# Altium PCB sami_updated_v3.PcbDoc
Units mil, origin at the board's own origin, x right, y up, seen from the top; angles counter-clockwise.
Board outline 1157.48 x 610 mil, 2 copper layers (Top Layer, Bottom Layer); 22 components, 24 nets, 105 pads, 43 vias.
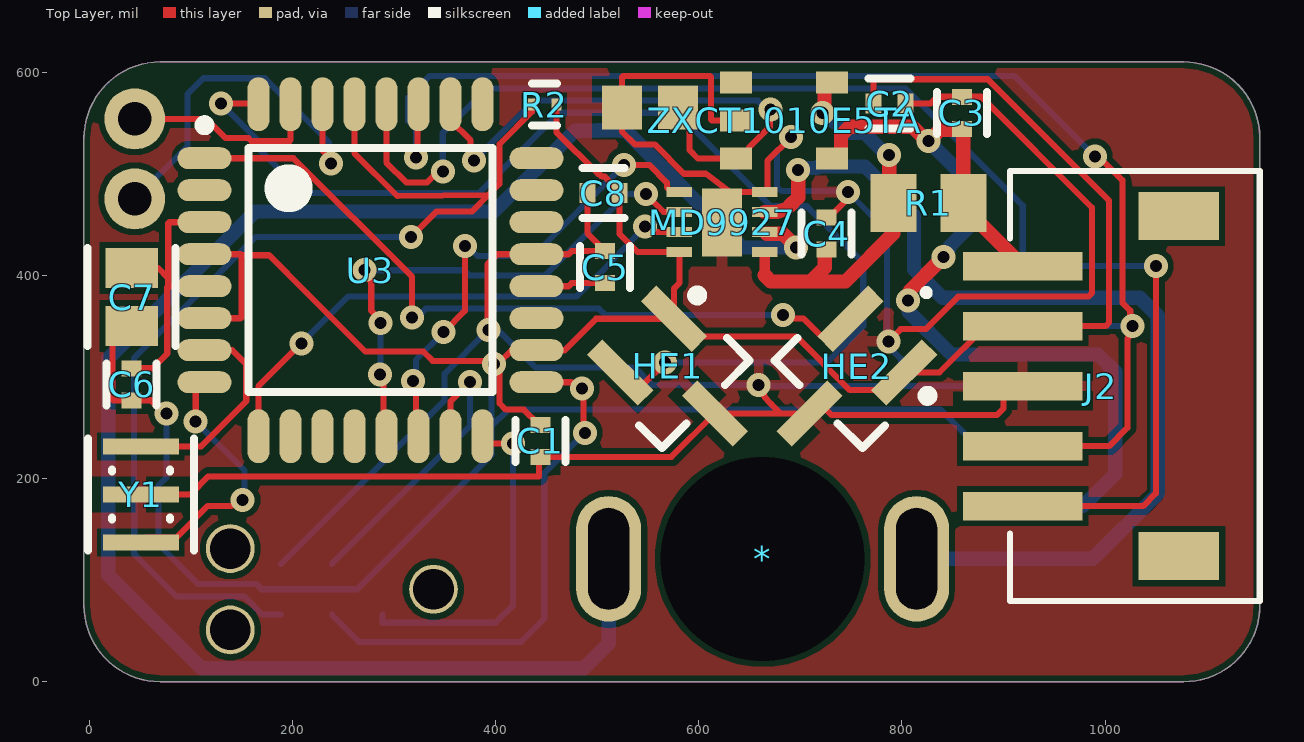
[diagram p0: Top Layer view]
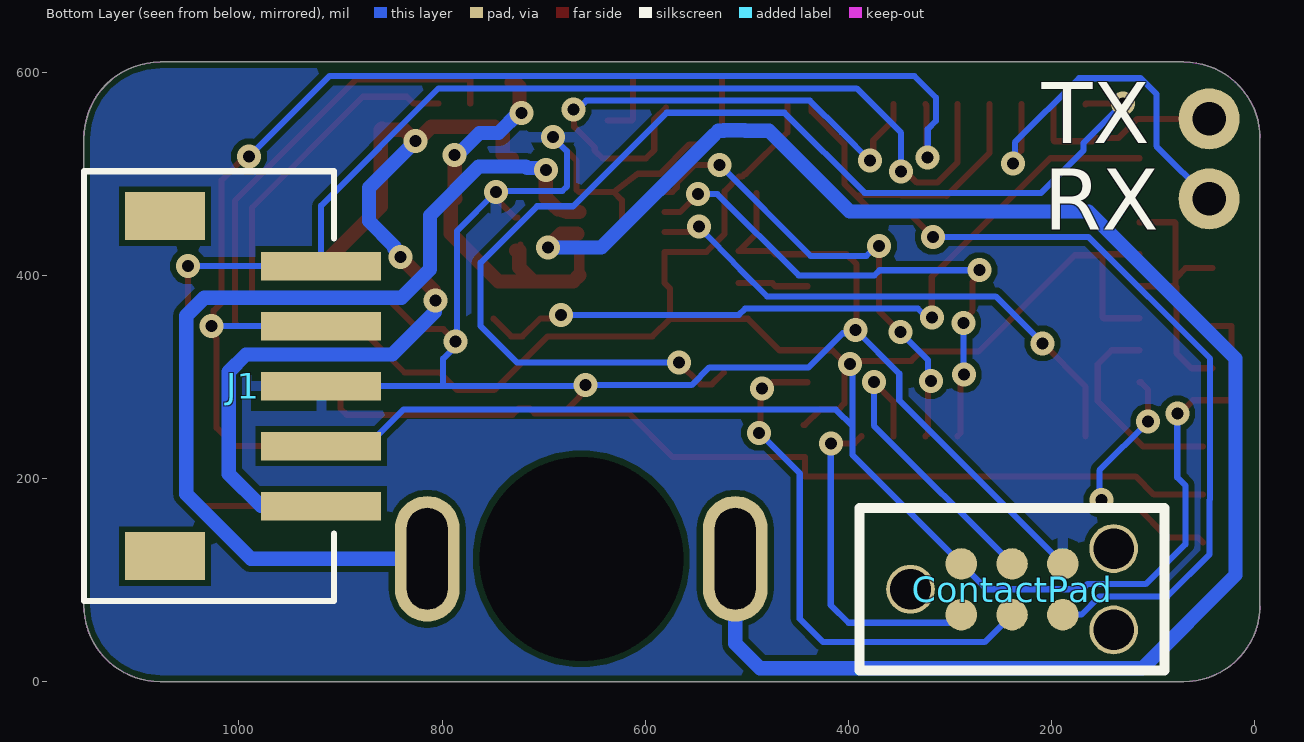
[diagram p1: Bottom Layer view, seen from below]
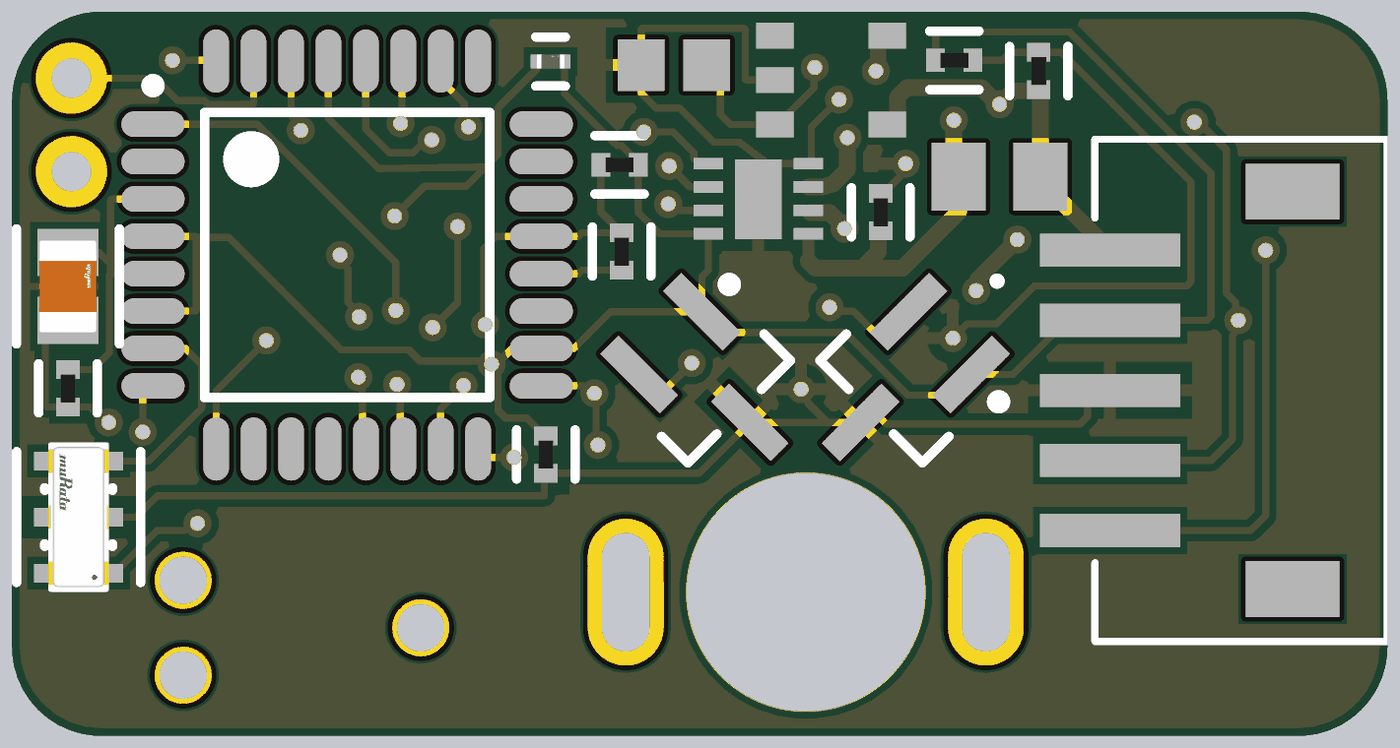
[diagram p2: 3D render of the assembled board from above, using the file's embedded part models]

## Layer stack, top to bottom
Top Solder: solder mask 0.4, Solder Resist, Dk 3.5
Top Layer: signal copper 1.4
Dielectric 1: dielectric 12.6, FR-4, Dk 4.8
Bottom Layer: signal copper 1.4
Bottom Solder: solder mask 0.4, Solder Resist, Dk 3.5

## Board outline
-5,75 ccw(c70,75) 70,0 1077.48,0 ccw(c1077.48,75) 1152.48,75 1152.48,535 ccw(c1077.48,535) 1077.48,610 70,610 ccw(c70,535) -5,535

## Design rules (kind name [scope] priority, off if disabled: settings)
Clearance Clearance_1 [All] p1: gap=6 ignorepadtopadclearanceinfootprint=FALSE except(0: Arc-Hole Track-Hole SMDPad-Hole THPad-Hole Via-Hole Fill-Hole Poly-Hole Region-Hole Text-Hole)
HoleSize [All] p1: absolutevalues=TRUE maxlimit=100 minlimit=11.81 maxpercent=80.000 minpercent=20.000
MinimumAnnularRing [All] p1: minimumring=7.87
PolygonConnect [All] p1: connectstyle=Relief reliefconductorwidth=10 reliefentries=4 polygonreliefangle="90 Angle" airgapwidth=10
RoutingVias [All] p1: holewidth=11.81 width=23.62 viastyle="Through Hole" minholewidth=11.81 minwidth=23.62 maxholewidth=11.81 maxwidth=23.62
SolderMaskExpansion [All] p1: expansion=4 istentingtop=FALSE
Width [All] p1: maxlimit=15 minlimit=6 preferedwidth=6 minimp=50.000000 maximp=50.000000 favimp=50.000000
29 further rules are at their usual default settings.

## Classes and differential pairs
component class updated_sami_board_v3: 3 C1 C2 C3 C4 C5 C6 C7 C8 HE1 HE2 J1 J2 R1 R2 U3 Y1

## Components (designator, comment, footprint, x,y, rotation, side; value= is the part's Value field where it differs from the comment)
* "Component_1" "UART Header Pins" 45,475.26 r0 top
* "Poluou motor" PCBComponent_1 814.57,121 r180 top
C1 "GRM155R71C104KA88D - 0.1 uF -16V" FP-GRM15-MFG 444.25,237 r90 top value=0.10μF
C2 "GRM155R71C104KA88D - 0.1 uF - 16V" FP-GRM15-MFG 788,569 r180 top value=0.10μF
C3 "GRM155R71C104KA88D - 0.1 uF - 16V" FP-GRM15-MFG 859,560 r270 top value=0.10μF
C4 "GRM155R71C104KA88D - 0.1 uF - 16V" FP-GRM15-MFG 726,441 r270 top value=0.10μF
C5 "GRM155R71C104KA88D - 0.1 uF - 16V" FP-GRM15-MFG 508,408 r270 top value=0.10μF
C6 "GRM155R71C104KA88D - 0.1 uF - 16V" FP-GRM15-MFG 42,292.75 r270 top value=0.10μF
C7 "GRM21BR61E106KA73L - 10 uF -25V" FP-GRM21B-0_15-IPC_C 42,378.59 r90 top
C8 "GRM155R71C104KA88D - 0.1 uF - 16V" FP-GRM15-MFG 506.25,481 r0 top value=0.10μF
ContactPad "6 Pin Contact Pad" 6PinContactPad 29,71 r90 bottom
HE1 "TLE4946-2K" INF-PG-SC59_M 582.59,297.41 r315 top
HE2 "TLE4946-2K" INF-PG-SC59_M 742.41,297.41 r225 top
J1 "S5B-ZR-SM4A-TF (LF) (SN)" CONN_S5B-ZR-SM4A-TF_JST 919,172.83 r90 bottom
J2 "S5B-ZR-SM4A-TF (LF) (SN)" CONN_S5B-ZR-SM4A-TF_JST 919,409.11 r270 top
MD9927 "MD9927" MD9927 665.03,482 r180 top
R1 "RL1220S-R50-F - 0.5 Ohm 1/3W" RESC2013X50X40NL20T20 826,471 r180 top
R2 "ERJ-1GNF1002C - 10kOhm 1/20 W" FP-ERJ1G-MFG 448.19,568 r0 top value=10kΩ
R3 "ERA3AEB122V - 1.2 kOhm, 1/10W" RESC1608X55X30ML20T20 552,565 r0 top
U3 "ATmega328-AU" 32A_L 277,405 r0 top
Y1 "CSTNE16M0V53C000R0 - 16 MHz Crystal" FP-CSTNE16M0V53C000R0-MFG 51,184.24 r270 top
ZXCT1010E5TA "ZXCT1010E5TA" ZXCT1010E5TA 731.49,515 r90 top

## Footprints (in the part's own frame and the unit in brackets; to place one, negate y for a bottom-side part, rotate by r counter-clockwise, add the part's x,y. Pads: shape width x height; smd on the part's side, far side on the other; paste and mask are expansions set on the pad)
6PinContactPad [mil]
  round 30.98 smd: 1(-5,260) 2(45,260) 3(-5,210) 4(45,210) 5(-5,160) 6(45,160)
  round 48 hole 40 unplated: 25(20,310) 26(-20,110) 27(60,110)
  silkscreen extent -60,60 100,360
32A_L [mm] "Thin QFP, 32-Leads, Body 7x7mm, Pitch 0.8mm, IPC High Density"
  oval 1.35x0.55 smd: 1(-4.15,2.8) 2(-4.15,2) 3(-4.15,1.2) 4(-4.15,0.4) 5(-4.15,-0.4) 6(-4.15,-1.2) 7(-4.15,-2) 8(-4.15,-2.8) 17(4.15,-2.8) 18(4.15,-2) 19(4.15,-1.2) 20(4.15,-0.4) 21(4.15,0.4) 22(4.15,1.2) 23(4.15,2) 24(4.15,2.8)
  oval 0.55x1.35 smd: 9(-2.8,-4.15) 10(-2,-4.15) 11(-1.2,-4.15) 12(-0.4,-4.15) 13(0.4,-4.15) 14(1.2,-4.15) 15(2,-4.15) 16(2.8,-4.15) 25(2.8,4.15) 26(2,4.15) 27(1.2,4.15) 28(0.4,4.15) 29(-0.4,4.15) 30(-1.2,4.15) 31(-2,4.15) 32(-2.8,4.15)
  silkscreen extent -4.27,-3.05 3.05,3.75, body extent -3.5,-3.5 3.5,3.5, height 1.2
CONN_S5B-ZR-SM4A-TF_JST [mil]
  rect 28x118 smd paste+0 mask+0: 1(0,0) 2(59.06,0) 3(118.11,0) 4(177.17,0) 5(236.22,0)
  rect 47x79 smd: 6(-49.21,153.62) 7(285.43,153.62)
  silkscreen extent -93,-13 330,233, body extent 0,0 10,10, height 10
FP-CSTNE16M0V53C000R0-MFG [mm]
  rect 0.4x1.9 smd paste+0 mask+0: 1(-1.2,0) 2(0,0) 3(1.2,0)
  silkscreen extent -1.4,-1.33 1.4,1.33, body extent -1.6,-0.65 1.6,0.65, height 1
FP-ERJ1G-MFG [mm]
  rect 0.25x0.3 smd paste+0 mask+0: 1(-0.3,0) 2(0.3,0)
  silkscreen extent -0.32,-0.53 0.32,0.53, body extent -0.53,-0.27 0.53,0.27, height 0.25
FP-GRM15-MFG [mm]
  rect 0.4x0.5 smd paste+0 mask+0: 1(-0.4,0) 2(0.4,0)
  silkscreen extent -0.53,-0.62 0.53,0.62, body extent -0.7,-0.38 0.7,0.38, height 0.25
FP-GRM21B-0_15-IPC_C [mil]
  rect 39.6x51.5 smd paste+0 mask+0: 1(-28.59,0) 2(28.59,0)
  silkscreen extent -48,-43 48,43, body extent -39,-25 39,25, height 55
INF-PG-SC59_M [mm] "SOT23, 3-Leads, Body 3x1.53mm, Pitch 0.95mm, IPC Low Density"
  rect 1.8x0.55 smd: 1(-1.2,0.95) 2(-1.2,-0.95) 3(1.2,0)
  silkscreen extent -1.32,-1.55 0.88,1.9, body extent -0.88,-1.55 0.88,1.55, height 1.35
MD9927 [mm]
  rect 0.635x0.25 smd mask+0: GND(0,0) IN1(2.135,0.5) IN2(2.135,0) nSLEEP(2.135,1) OUT1(0,1) OUT2(0,0.5) VCC(2.135,1.5) VM(0,1.5)
  rect 1x1.7 smd mask+0: GND(1.068,0.762)
PCBComponent_1 [mm]
  round 0 hole 5.1: 28(3.85,0)
  rrect100% 1.62x3.14 hole 1.02 slot 2.54 at 90 deg: m+(7.7,0) m-(0,0)
RESC1608X55X30ML20T20 [mm] "Chip Resistor, 2-Leads, Body 1.60x0.80mm, IPC Low Density"
  rect 1x1.1 smd: 1(-0.7,0) 2(0.7,0)
  body extent -0.9,-0.5 0.9,0.5, height 0.55
RESC2013X50X40NL20T20 [mm] "Chip Resistor, 2-Leads, Body 2.00x1.25mm, IPC Medium Density"
  rect 1.15x1.45 smd: 1(-0.875,0) 2(0.875,0)
  body extent -1.1,-0.72 1.1,0.72, height 0.5
"UART Header Pins" [mil]
  round 60 hole 33.23: RX(0,0) TX(0,78.74)
ZXCT1010E5TA [mm]
  rect 0.55x0.8 smd mask+0: GND(0.95,2.4) IOUT(0,2.4) NC(1.9,2.4) VSENSE+(0,0) VSENSE-(1.9,0)

## Part data
C1 C2 C3 C4 C5 C6 C8: library part CMP-2100-03641-2, "CAP CER 0.1UF 16V X7R 0402", Capacitance=0.10μF, Manufacturer=Murata, Manufacturer Part Number=GRM155R71C104KA88D, Package=GRM15, Temperature="-55°C to +125°C", Temperature Characteristic=X7R, Temperature Range High=+125°C, Temperature Range Low=-55°C, Tolerance=10%, Voltage Rating=16Vdc, Category=Cap, ComponentLink2Description=Datasheet, ComponentLink2URL=https://search.murata.co.jp/Ceramy/image/img/A01X/G101/ENG/GRM155R71H471KA01-01A.pdf, Device Class L1="Passive Components", Device Class L2=Capacitors, Device Class L3="Ceramic Capacitors", Digikey Description="CAP CER 0.1UF 16V X7R 0402", Height=0.55mm, Ipc Land Pattern Name=CAPC10050X219, Lead Free=yes, Material=Ceramic, Mouser Description="0402 0.1 uF 16V ±10 % Tolerance X7R SMT Multilayer Ceramic Capacitor", Octopart=https://octopart.com/grm155r71c104ka88d-murata-196880, RoHS=TRUE, Standoff Height=0mm
C7: library part CMP-2007-03541-2, "Chip Multilayer Ceramic Capacitors for General Purpose, 0805, 10uF, X5R, 15%, 10%, 25V", Capacitance=10uF, Case Code (Imperial)=0805, Case Code (Metric)=2012, Dielectric=X5R, Max Operating Temperature=85°C, Min Operating Temperature=-55°C, Package Quantity=1, Tolerance=10%, Voltage=25V, Case/Package=0805, Depth=1.25mm, Height=1.25mm, Lead Free="Lead Free", Length=2mm, Material=Ceramic, Mount="Surface Mount", Packaging="Tape and Reel", Radiation Hardening=No, Termination=SMD/SMT, Thickness=0.053inch, Voltage Rating=25V, Voltage Rating (DC)=25V, Width=0.049inch
HE1 HE2: library part CMP-1148-00006-1, "High Precision Hall Effect Latch, PG-SC59, Reel, Green", Manufacturer=Infineon, Bhyst (25degreesC) max="4Â mT", Bop (25degreesC) min="2Â mT", Brp (25degreesC) typ="-2Â mT", Chopped Hall Technology=TRUE, ComponentLink1Description="Manufacturer URL", ComponentLink1URL=http://www.infineon.com/, ComponentLink2Description=Datasheet, ComponentLink2URL=http://www.infineon.com/dgdl/TLE4946-2K_DS_Rev1.pdf?folderId=db3a30431f848401011facc1c83b4674&fileId=db3a30431f848401011fbc925c48637f, ComponentLink3Description="Package Specification", ComponentLink3URL=http://www.infineon.com/dgdl/SC59-Package_Overview.pdf?folderId=db3a30431936bc4b01194dc0d34440b0&fileId=db3a30431936bc4b01194dd1aa1d40cf, DatasheetVersion="Rev. 1.0", Direction Detection=FALSE, Green=TRUE, Interface="open collector", Mounting Technology="Surface Mount", PackageDescription="3-Pin Semiconductor Package, 3 x 1.53 mm Body, 0.95 mm Pitch", PackageReference=PG-SC59, PackageVersion=Mar-08, Packing=Reel, PartNumber=TLE4946-2K, Target Application=Automotive, Type=Latch
J1 J2: "No Description Available", Mfr_Name=JST, Copyright="Copyright (C) 2021 Ultra Librarian. All rights reserved.", Manufacturer_Part_Number="S5B-ZR-SM4A-TF (LF) (SN)", RefDes=RefDes, Type=DEV
R1: library part CMP-2001-03168-1, Manufacturer=Susumu, Part Number=RL1220S-R50-F
R2: library part CMP-2004-03445-2, "RES SMD 10K OHM 1% 1/20W 0201", Manufacturer="Panasonic Electronic Components", Manufacturer Part Number=ERJ-1GNF1002C, Package=ERJ1G, Power Rating=0.05W, Resistance=10kΩ, Temperature="-55°C to +125°C", Temperature Coefficient=200ppm/°C, Temperature Range High=+125°C, Temperature Range Low=-55°C, Tolerance=1%, Voltage Rating=25V, Automotive=Yes, Automotive Grade="Grade 1", Category=Res, ComponentLink2Description=Datasheet, ComponentLink2URL=https://industrial.panasonic.com/cdbs/www-data/pdf/RDA0000/AOA0000C304.pdf, Composition="Thick Film", Device Class L1="Passive Components", Device Class L2=Resistors, Device Class L3="Chip SMD Resistors", Digikey Description="RES SMD 10K OHM 1% 1/20W 0201", Footprint Url=https://industrial.panasonic.com/cdbs/www-data/pdf/RDA0000/DMA0000COL17.pdf, Height=0.26mm, Lead Free=Yes, Mouser Description="Thick Film Resistors - SMD 0201 10Kohm 1% HalogenFree AEC-Q200", Octopart=https://octopart.com/erj-1gnf1002c-panasonic-55419697, RoHS=TRUE, Series=ERJ
R3: library part CMP-2000-00897-1, Manufacturer=Panasonic, Part Number=ERA3AEB122V
U3: library part CMP-0095-00261-2, "8-bit AVR Microcontroller, 32KB Flash, 1KB EEPROM, 2KB SRAM, 32-pin TQFP, Industrial Grade (-40°C to 85°C)", Code_JEDEC=MS-026-ABA, ComponentLink1Description="Manufacturer URL", ComponentLink1URL=http://www.atmel.com/, ComponentLink2Description="ATmega48A/48PA/88A/88PA/168A/168PA/328/328P Datasheet", ComponentLink2URL=http://www.atmel.com/dyn/resources/prod_documents/doc8271.pdf, ComponentLink3Description="ATmega48A/48PA/88A/88PA/168A/168PA/328/328P Summary", ComponentLink3URL=http://www.atmel.com/dyn/resources/prod_documents/8271S.pdf, DatasheetVersion="revD, May-2011", PackageDescription="32-Lead, 7x7x1.0 mm Body, 0.8mm Lead Pitch, Thin Profile Plastic Quad Flat Package (TQFP)", PackageReference=32A, PackageVersion="revC, Oct-2010", RevisionNote="DatasheetVersion & PackageVersion updated. URLs added."
Y1: library part CMP-06057-000009-1, "CERAMIC RES 16.0000MHZ 15PF SMD", Capacitance=15pF, Case/Package=SMD/SMT, Frequency=16MHz, Frequency Stability=0.15%, Frequency Tolerance=0.5%, Max Operating Temperature=125°C, Min Operating Temperature=-40°C, Resistor Type=Ceramic, Impedance=40R, Mount="Surface Mount", Packaging="Tape and Reel"

## Via types
v1: diameter 23.62, hole 11.81, Top Layer to Bottom Layer, tented both sides, 43 vias

## Nets (pads, with @x,y where several pads share a name; then routed paths per layer and width w, separated by ;. In a path a pad name is that pad's centre, name@x,y a point inside that pad or via, vN(x,y) a via of type N, cw(c..) or ccw(c..) an arc to the next point about the centre after c; other vN are vias at no path point)
CUR1_TO_OPAMP_IN+: C4.2 MD9927.VM R1.2 ZXCT1010E5TA.VSENSE- | length 414.8
  Top Layer w6: C4.2@722.77,430.13 C4.2 ; R1.2@787,475.55 R1.2
  Top Layer w10: 665,400 MD9927.VM
  Top Layer w14: 665,400 671,394 710.23,394 ; v1(722,560) 723.84,561.84 723.84,585.98 727.67,589.8 ZXCT1010E5TA.VSENSE- ; C4.2@727.05,424.38 724.03,424.38 724.03,407.8 710.23,394 ; R1.2@787,475.55 787.54,476.1 v1(787.54,518.54) ; R1.2 791.55,441.05 744.5,394 710.23,394
  Bottom Layer w14: v1(722,560) 724.6,560 744.42,540.18 763.3,540.18 784.94,518.54 v1(787.54,518.54)
CURRENT_IN: R3.2 U3.26 ZXCT1010E5TA.IOUT | length 545.4
  Top Layer w6: U3.26 355.74,552.64 375.63,532.75 375.63,516.37 v1(379,513) ; R3.2 591.14,553.42 591.14,523.18 599.32,515 641.92,515 649.75,522.83 649.75,525.85 670.01,546.11 670.01,562.46 v1(670.56,563)
  Bottom Layer w6: v1(379,513) 406.69,540.69 438,572 658.23,572 667.23,563 v1(670.56,563)
GND: C1.1 C2.1 C3.1 C4.1 C5.1 C8.1 ContactPad.6 HE1.3 HE2.3 J1.3 J2.3 MD9927.GND R3.1 U3.21 Y1.2 ZXCT1010E5TA.GND | length 3467.4
  Top Layer w6: Y1.2 99.41,184.24 117.34,202.18 402.93,202.18 442.99,202.18 442.99,221.25 C1.1 573.25,221.25 HE1.3 681,264 ; v1(393.08,346.38) 392.06,347.39 392.06,410.81 402,420.75 U3.21 472,420.75 475,423.75 C5.1 490.5,441.24 C8.1 ; MD9927.GND@623,452 623,474 MD9927.GND@631,482 ; ZXCT1010E5TA.GND 613,552.4 612,553.4 612,595 611,596 525.44,596 524.44,595 R3.1 524.44,541.56 537.19,528.81 556.59,528.81 585.4,500 607,500 MD9927.GND@631,482 ; v1(659,292) 659,287.23 664.72,281.52 664.72,280.28 671.69,273.31 681,264 ; v1(691,536) 667.67,512.67 667.67,483.92 665.03,482 MD9927.GND@631,482 ; C4.1 727.97,456.75 743.63,472.41 743.63,478.63 v1(747,482) ; v1(786.77,335) 798.77,347 823.5,347 855.5,379 983.49,379 987,382.51 987,466.75 878,575.75 C3.1 834.75,575.75 828,569 C2.1 ; J2.3 911,291 900,280 900,268.86 893.8,262.66 730.72,262.66 724.72,268.66 713.66,268.66 HE2.3 681,264
  Bottom Layer w6: ContactPad.6 350,277 350,303.3 v1(393.08,346.38) ; v1@393.08,347.44 397.51,343.01 405.62,343.01 439.25,309.37 536.96,309.37 554.34,292 v1(659,292) 660.06,290.94 799,290.94 ; v1(691,536) 677.12,522.12 677.12,487.38 681.51,482.99 746.01,482.99 785.49,443.51 785.49,336.28 v1(786.77,335) 786.77,330.23 799,318 799,290.94 ; J1.3 799,290.94
INPUT1: MD9927.IN1 U3.13 | length 525.4
  Top Layer w6: v1(271,405) 271,400.23 277.77,393.46 277.77,365.33 287,356.09 v1(287,353) ; v1(286.43,302.14) 289.75,298.82 289.75,244.61 U3.13 ; v1(548,480) 565.68,462.32 MD9927.IN1
  Bottom Layer w6: v1(271,405) 369.38,405 374.38,400 449,400 529,480 v1(548,480) ; v1(286.43,302.14) 286.71,302.43 286.71,352.71 v1(287,353)
INPUT2: MD9927.IN2 U3.14 | length 476.7
  Top Layer w6: v1(319,296) 321.62,293.38 321.62,244.24 U3.14 ; v1(349,344) 370,365 v1(370,429) ; v1(526.76,508.65) 551.35,508.65 568.81,491.19 568.81,486.58 573.39,482 MD9927.IN2
  Bottom Layer w6: v1(319,296) 321.81,298.81 321.81,316.81 v1(349,344) ; v1(370,429) 372.33,429 382.33,419 437.11,419 v1(526.76,508.65)
INPUT3: MD9927.nSLEEP U3.9 | length 531.3
  Top Layer w6: U3.9 166.76,290.76 v1(209,333) ; v1(547.2,448.03) 551.97,448.03 557.37,442.63 MD9927.nSLEEP
  Bottom Layer w6: v1(209,333) 255.19,379.19 480.19,379.19 506.7,405.7 v1(547.2,448.03)
M+: *.m+ MD9927.OUT1 | length 1689.1
  Top Layer w14: MD9927.OUT1@667,440.87 682.91,440.87 691.11,432.66 v1(695.61,427.26)
  Bottom Layer w6: 528.19,542.31 532.19,538.31
  Bottom Layer w14: *.m+ 511.43,37.5 487.18,13.25 110.75,13.25 19,105 19,318 163.69,462.69 398.69,462.69 478.31,542.31 501.5,542.31 502,542.81 522.56,542.81 523.05,542.31 528.19,542.31 ; 532.19,538.31 643.24,427.26 v1(695.61,427.26)
M-: *.m- MD9927.OUT2 | length 951.5
  Top Layer w14: MD9927.OUT2 676.89,462.32 685.83,464.93 689.73,468.48 697.93,476.68 v1(697.93,503.8)
  Bottom Layer w14: v1(697.93,503.8) 699.77,505.64 716.21,505.64 717.74,507.17 763.83,507.17 812,459 812,406 840,378 1034.09,378 1051.81,360.28 1051.81,184.81 988,121 *.m-
MISO: ContactPad.1 U3.16 | length 335.9
  Top Layer w6: U3.16 394.3,234.55 v1(417.45,234.55)
  Bottom Layer w6: ContactPad.1 289,58 400,58 417.45,75.45 v1(417.45,234.55)
MOSI: ContactPad.4 U3.15 | length 296.7
  Top Layer w6: U3.15 355.74,275.74 v1(375,295)
  Bottom Layer w6: ContactPad.4 375,252 v1(375,295)
MOTOR1_IN: C3.2 J1.1 J2.1 R1.1 ZXCT1010E5TA.VSENSE+ | length 973.9
  Top Layer w6: v1@841,414.5 v1(841,418) ; 859,507.45 860.45,506 ; R1.1@860.45,467.66 R1.1
  Top Layer w14: ZXCT1010E5TA.VSENSE+ 736.41,515 740.24,518.83 740.24,537.96 748.44,546.16 810.61,546.16 824.77,532 v1(826.1,532) 837.48,543.38 858.13,543.38 C3.2 859.58,544.25 860.45,543.38 860.45,506 R1.1 ; v1(806.3,375) 808.14,376.84 808.14,385.14 837.86,414.86 840.64,414.86 v1@841,414.5 ; R1.1@860.45,467.66 J2.1
  Bottom Layer w6: J1.1 978.33,172.83
  Bottom Layer w14: v1(806.3,375) 806.84,374.46 806.84,364.16 849,322 993,322 1010,305 1010,204.5 978.33,172.83 ; v1(826.1,532) 872,486.1 872,453.44 847,428.44 847,426.6 841,420.6 v1(841,418)
NetC5_2: C5.2 U3.20 | length 68.9
  Top Layer w6: U3.20 472,389.25 475,392.25 C5.2
NetC6_1: C6.1 C7.2 U3.3 U3.5 | length 279.5
  Top Layer w6: C6.1 62.5,308.5 77,323 77,388.25 ; C7.2 68,407.18 78,397.18 ; U3.5 79,389.25 78,390.25 78,397.18 ; U3.3 79,452.24 78,451.24 78,397.18
NetU3_7: U3.7 Y1.1 | length 205.3
  Top Layer w6: Y1.1 109.92,231.49 154.69,276.26 154.69,312.5 140.93,326.26 U3.7
NetU3_8: U3.8 Y1.3 | length 258.2
  Top Layer w6: Y1.3 55.87,141.87 85.87,141.87 117,173 140.23,173 146.23,179 v1(151,179) ; v1(105,256) 105,287.53 112.23,294.76 U3.8
  Bottom Layer w6: v1(105,256) 153,208 153,181 v1(151,179)
Q1: HE1.2 U3.32 | length 1134
  Top Layer w6: v1(130,569) 166.15,569 U3.32 ; HE1.2 534.52,292.59 545.59,292.59 v1(567,314)
  Bottom Layer w6: v1(130,569) 168.84,530.16 168.84,522.66 210.35,481.15 384.15,481.15 463,560 579,560 671,468 706.5,468 762,412.5 762,350 726,314 v1(567,314)
Q2: HE2.2 U3.1 | length 746.4
  Top Layer w6: U3.1 201.2,515.24 318,398.43 v1(318,358.38) ; v1(683,361) 686.37,357.63 703.13,357.63 720.9,339.86 731.97,339.86 HE2.2
  Bottom Layer w6: v1(318,358.38) 322.77,358.38 331.58,367.19 501.81,367.19 508,361 v1(683,361)
RESET: ContactPad.5 R2.1 U3.29 | length 1081.9
  Top Layer w6: U3.29 261.25,520.25 303.6,477.9 393.15,479.15 ; v1(317,437.88) 342.12,463 377,463 393.15,479.15 ; R2.1 436.38,561.38 404,529 404,490 393.15,479.15
  Bottom Layer w6: ContactPad.5 170.67,66 152.67,84 86,84 44.5,125.5 44.5,179 44.19,179.31 44.19,318.19 163.88,437.88 v1(317,437.88)
RX: *.RX U3.30 | length 379.9
  Top Layer w6: U3.30 229.76,523.01 238,514.77 v1(238,510)
  Bottom Layer w6: *.RX 97,527.26 97,578.5 112.5,594 173,594 236.19,530.81 236.19,511.81 v1(238,510)
SCK: ContactPad.3 U3.17 | length 524.2
  Top Layer w6: U3.17 475,294.76 481.2,288.56 v1(485,288.56) 486.5,287.06 486.5,246.5 v1(488,245)
  Bottom Layer w6: ContactPad.3 266,39 425,39 448,62 448,205 v1(488,245) ; v1(485,288.56) v1@487.96,288.56
SCL: J1.5 J2.5 U3.28 | length 1350.8
  Top Layer w6: U3.28 292.75,510.94 312.5,491.19 332.61,491.19 343.39,501.96 v1(348.15,501.96) ; J2.5 1037.5,172.89 1050,185.39 v1(1050,409)
  Bottom Layer w6: v1(348.15,501.96) 348.15,540.15 392,584 803.53,584 919,468.53 J1.5 1049.95,409.05 v1(1050,409)
SDA: J1.4 J2.4 U3.27 | length 1338
  Top Layer w6: v1(322,516) 323.12,517.12 323.12,567.26 U3.27 ; J2.4 1003.95,231.95 1022,250 1022,337.67 1023.63,339.3 1023.63,346.63 v1(1027,350) 1024.78,352.22 1024.78,365.22 1017,373 1017,493.53 993.53,517 v1(990,517)
  Bottom Layer w6: v1(322,516) 322,543.88 314,551.88 314,575 335,596 911,596 v1(990,517) ; J1.4 v1(1027,350)
TX: *.TX U3.31 | length 198.2
  Top Layer w6: *.TX 115.57,554 134.51,535.06 156.89,535.06 159.95,532 197.26,532 198.26,533 U3.31
VCC: C1.2 C2.2 C6.2 C7.1 C8.2 ContactPad.2 HE1.1 HE2.1 J1.2 J2.2 MD9927.VCC R2.2 U3.4 U3.6 U3.18 | length 3236.6
  Top Layer w6: C7.1 23,350 23,278 24,277 60.84,277 73.84,264 v1(76.38,264) ; U3.6 149,357.76 150,358.76 150,419.75 ; U3.4 149,420.75 150,419.75 ; v1(398.56,312.95) 396,310.39 v1@396,310.23 ; v1@403.29,302.95 v1@396,310.23 ; C1.2 442.99,252.75 427.99,267.75 410.25,267.75 404,274 404,302.95 404,314.26 416,326.26 U3.18 468,326.26 499,357.26 HE1.1 ; R2.2 460,540.85 501,499.84 502.11,499.84 504.76,497.19 507.78,497.19 522,482.97 C8.2 522,440.94 540,422.94 MD9927.VCC 580.97,392.34 575.63,387 HE1.1 ; C2.2 772.25,592 773.25,593 884.57,593 1004,473.57 1004,353.57 1000.49,350.06 J2.2 882.69,350.06 837,304.37 HE2.1 784.86,286.97 748.87,286.97 695.98,339.86 593.03,339.86 HE1.1 ; 150,419.75 177.25,419.75 214.51,382.49 272,325 329,325 338.19,315.81 390.42,315.81 v1@396,310.23
  Bottom Layer w6: v1(76.38,264) 76.38,201.17 68.38,193.18 68.38,135.12 107.5,96 164.85,96 169.85,91 264,91 ContactPad.2 396,223 396,251.25 ; v1(398.56,312.95) 396,310.39 396,251.25 ; J1.2 874,231.89 838.14,267.75 412.5,267.75 396,251.25
pads on no net: *.28 ContactPad.25 ContactPad.26 ContactPad.27 J1.6 J1.7 J2.6 J2.7 U3.2 U3.10 U3.11 U3.12 U3.19 U3.22 U3.23 U3.24 U3.25 ZXCT1010E5TA.NC

## Polygon pours and split planes (outlines as drawn)
GND on Top Layer "GND_L01_P001" (solid, remove dead copper, pour order 1): -115,666 -90,691 1276,691 1276,-91 1171,-196 -201,-196
GND on Bottom Layer "GND_L02_P000" (solid, remove dead copper, pour order 0): 995,643 1013,661 1208,661 1208,-185 1134,-111 -261,-111 -261,462 -54,669

## Keep-outs
Keep-Out Layer:
  the board outline again, w0.51

## Silkscreen, mask and mechanical layers (free items; w line width, h text height)
Top Overlay:
  circle w10: c824,383 r1.41
Bottom Overlay:
  text "TX" at 210,530 h60
  text "RX" at 208,445 h60